# Altium PCB PCBv2.PcbDoc
Units mm, origin at the board's own origin, x right, y up, seen from the top; angles counter-clockwise.
Board outline 125 x 105.5 mm, 2 copper layers (Top Layer, Bottom Layer), stack 1.571 mm thick; 42 components, 22 nets, 90 pads, 0 vias.
Unrouted connection lines stored in the file: 3.
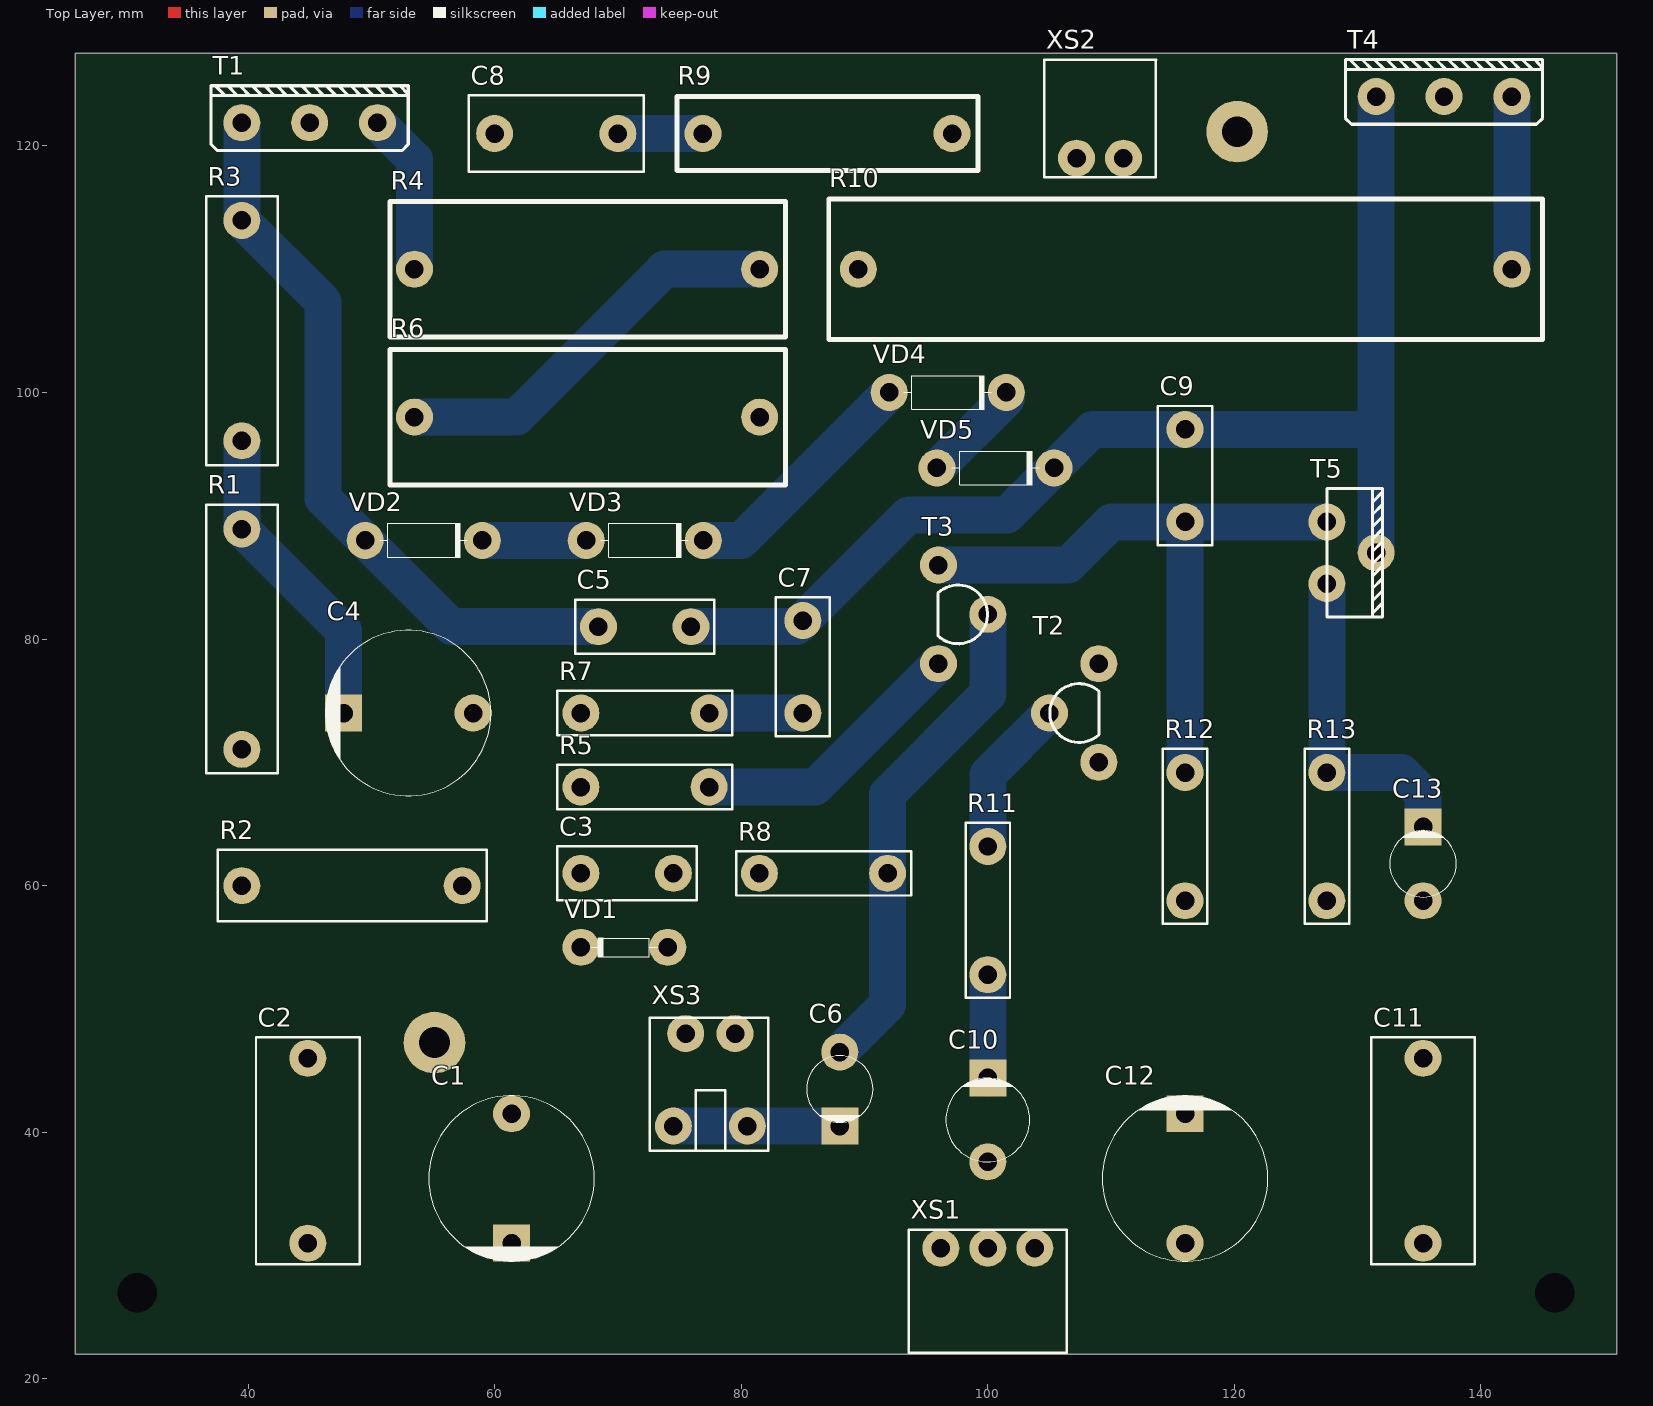
[diagram p0: Top Layer view]
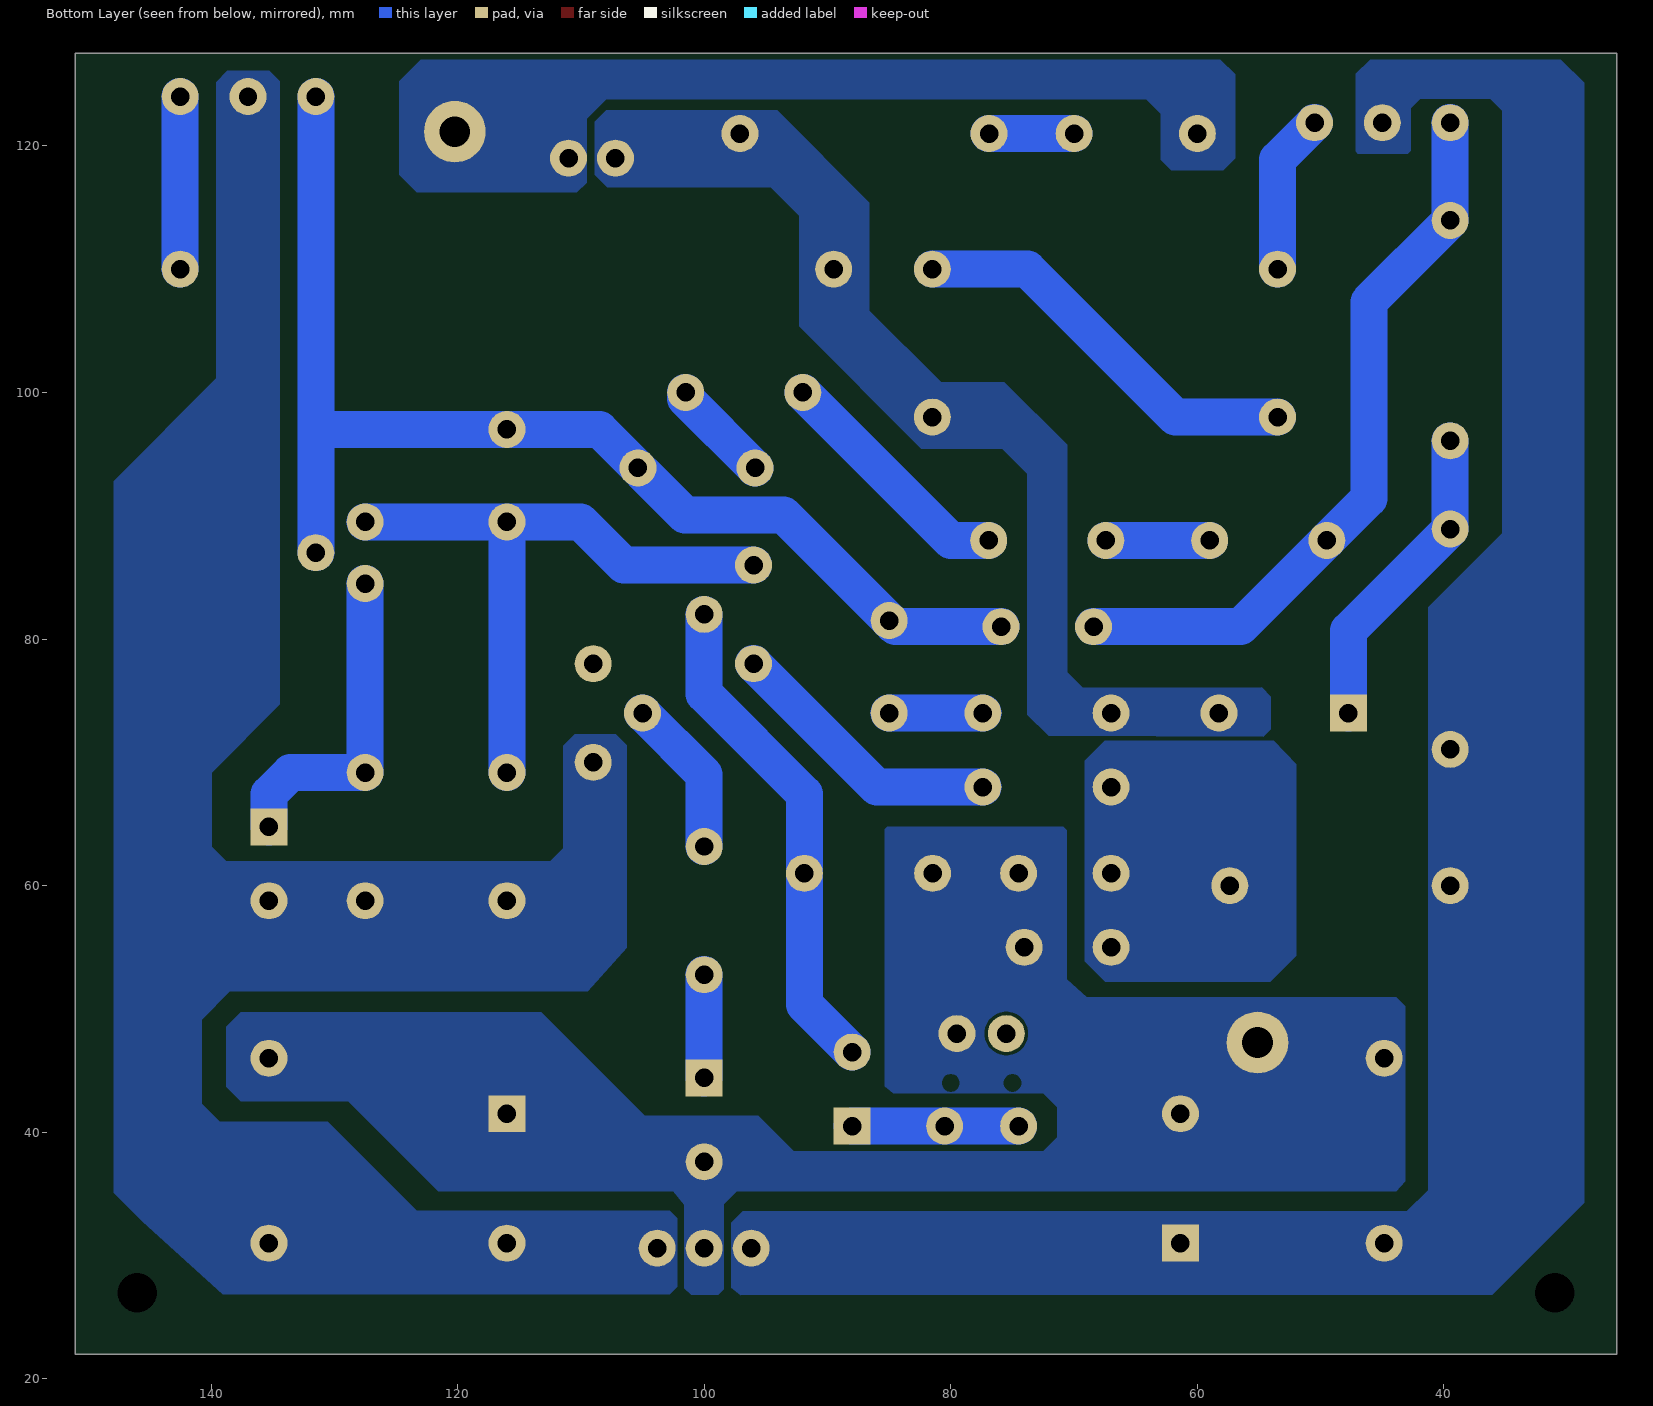
[diagram p1: Bottom Layer view, seen from below]
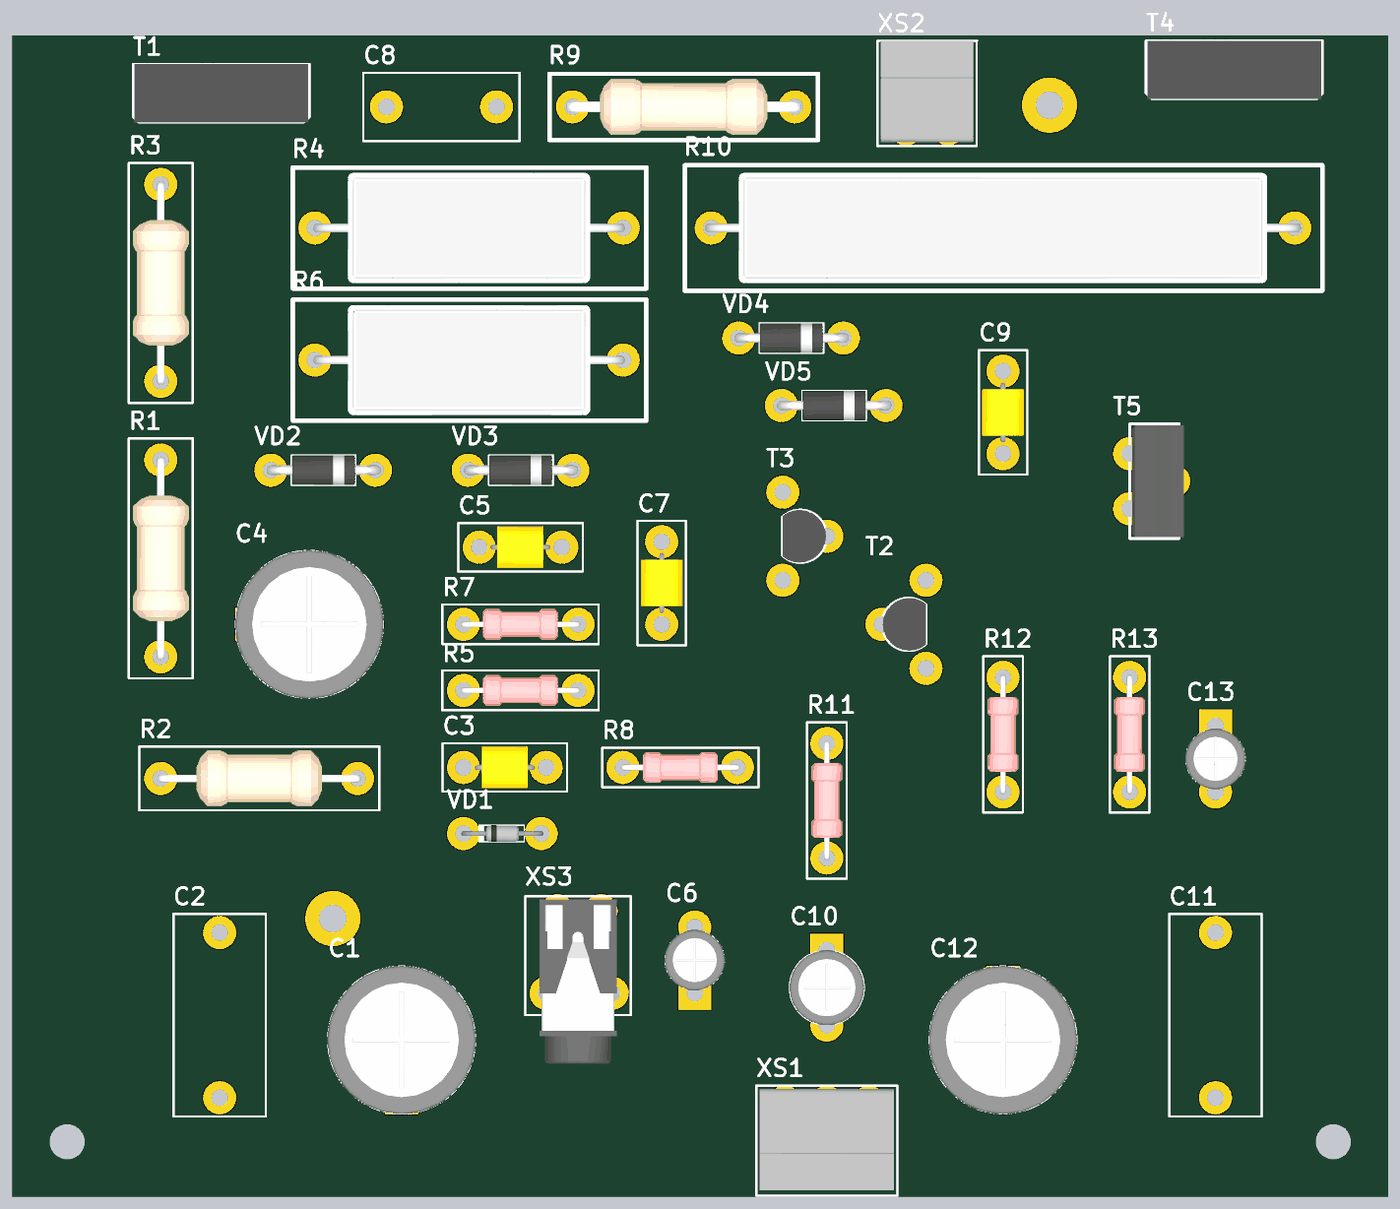
[diagram p2: 3D render of the assembled board from above, using the file's embedded part models]

## Layer stack, top to bottom
Top Solder: solder mask 0.0102, Solder Resist, Dk 3.5
Top Layer: signal copper 0.0356
Dielectric 1: dielectric 1.5, FR-4, Dk 4.8
Bottom Layer: signal copper 0.0356
Bottom Solder: solder mask 0.0102, Solder Resist, Dk 3.5

## Board outline
26,22 26,127.5 151,127.5 151,22

## Design rules (kind name [scope] priority, off if disabled: settings)
Clearance [All] p1: gap=0.254 ignorepadtopadclearanceinfootprint=FALSE except(0: Arc-Hole Track-Hole SMDPad-Hole THPad-Hole Via-Hole Fill-Hole Poly-Hole Region-Hole Text-Hole)
Height [All] p1: minheight=0 maxheight=50 prefheight=12.7
HoleSize [All] p1: absolutevalues=TRUE maxlimit=5 minlimit=0.025 maxpercent=80.000 minpercent=20.000
PolygonConnect PolygonConnect_2 [All vs IsNamedPolygon('GND_L02_P004') Or IsNamedPolygon('GND_L02_P007') Or IsNamedPolygon('NETC1_1_L02_P003') Or IsNamedPolygon('NETC3_1_L02_P005') Or IsNamedPolygon('NETC4_2_L02_P008') Or IsNamedPolygon('NETC11_2_L02_P006')] p1: connectstyle=Direct reliefconductorwidth=0.254 reliefentries=4 polygonreliefangle="90 Angle" airgapwidth=0.254
PolygonConnect PolygonConnect_1 [All vs IsNamedPolygon('NETC1_1_L02_P003')] p2: connectstyle=Direct reliefconductorwidth=0.254 reliefentries=4 polygonreliefangle="90 Angle" airgapwidth=0.254
PolygonConnect [All] p3: connectstyle=Relief reliefconductorwidth=0.254 reliefentries=4 polygonreliefangle="90 Angle" airgapwidth=0.254
RoutingVias [All] p1: holewidth=0.711 width=1.27 viastyle="Through Hole" minholewidth=0.711 minwidth=1.27 maxholewidth=0.711 maxwidth=1.27
SolderMaskExpansion [All] p1: expansion=0.102 istentingtop=FALSE
Width [All] p1: maxlimit=5 minlimit=0.254 preferedwidth=0.254
28 further rules are at their usual default settings.

## Classes and differential pairs
component class SchemeGOST: C1 C2 C3 C4 C5 C6 C7 C8 C9 C10 C11 C12 C13 R1 R2 R3 R4 R5 R6 R7 R8 R9 R10 R11 R12 R13 T1 T2 T3 T4 T5 VD1 VD2 VD3 VD4 VD5 XS1 XS2 XS3

## Components (designator, comment, footprint, x,y, rotation, side; value= is the part's Value field where it differs from the comment)
C1 "220uF/100V" "Cap 220U/100V" 61.375,36.25 r90 top
C2 "1uF/63V" "Cap 1u/63V" 44.85,38.5 r270 top
C3 "220nF" "Cap 220nF" 68,61 r0 top
C4 "220uF/50V" "Cap 220U/100V" 53,74 r0 top
C5 "470nF" "Cap 470n" 74.925,81 r180 top
C6 "10uF/25V" "Cap 10u/25V" 88,43.5 r90 top
C7 "220pF" "Cap 220p" 85,75 r90 top
C8 "100nF/100V" "Cap 100n/100V" 65,121 r0 top
C9 "100pF/100V" "Cap 100p" 116,90.5 r90 top
C10 "470uF/10V" "Cap 470u/10V" 100,41 r270 top
C11 "1uF/63V" "Cap 1u/63V" 135.3,38.5 r270 top
C12 "220uF/100V" "Cap 220U/100V" 116,36.25 r270 top
C13 "10uF/25V" "Cap 10u/25V" 135.3,61.775 r270 top
R1 "Resistor 1W" "Res 1W" 39.5,80 r270 top
R2 "Resistor 1W" "Res 1W" 48.45,60 r180 top
R3 "Resistor 1W" "Res 1W" 39.5,105 r90 top
R4 "Resistor 5W" "Res 5W" 67.5,110 r0 top
R5 "Resistor 0.25W" "Res 0.25W" 72.175,68 r180 top
R6 "Resistor 5W" "Res 5W" 67.5,98 r0 top
R7 "Resistor 0.25W" "Res 0.25W" 72.175,74 r180 top
R8 "Resistor 0.25W" "Res 0.25W" 86.7,61 r0 top
R9 "Resistor 2W" "Res 2W" 87,121 r0 top
R10 "Resistor 10W" "Res 10W" 116,110 r180 top
R11 "Resistor 0.25W" "Res 0.25W" 100,58 r90 top
R12 "Resistor 0.25W" "Res 0.25W" 116,64 r90 top
R13 "Resistor 0.25W" "Res 0.25W" 127.5,64 r90 top
T1 "TIP142" TO-247 45,121.875 r0 top
T2 "BC556B" TO-92-A 107,74 r270 top
T3 "BC556B" TO-92-A 98,82 r90 top
T4 "TIP147" TO-247 137,124 r0 top
T5 "BD241C" TO-220 129.5,87 r270 top
VD1 "ZPD12" DO-35 70.525,55 r180 top
VD2 "Diode 1N4001" DO-41 49.5,88 r0 top
VD3 "Diode 1N4001" DO-41 67.425,88 r0 top
VD4 "Diode 1N4001" DO-41 92,100 r0 top
VD5 "Diode 1N4001" DO-41 95.875,93.875 r0 top
XS1 "Connector 15EDGRC-3.81-03P" 15EDGRC-3.81-03P 100,30.6 r0 top
XS2 "Connector 15EDGRC-3.81-02P" 15EDGRC-3.81-02P 109.1,119 r180 top
XS3 "Connector ST-025" ST-025 74.1,39.9 r0 top
ZBOAS148591470 "Слой 2" "BOASVIEWlayer:Bottom Layer:1:1:32:1" 37.725,2323.35 r0 top (schematic designator fewf)
ZBOAS149689960 "Comment" "BOASVIEWside:Вид платы сверху:1:0:0:0" 38,2285 r0 top
ZBOAS634799751 "Comment" "BOASVIEWdrill:Таблица отверстий:0:0:0:0" 175.45,2494.4 r0 top

## Footprints (in the part's own frame and the unit in brackets; to place one, negate y for a bottom-side part, rotate by r counter-clockwise, add the part's x,y. Pads: shape width x height; smd on the part's side, far side on the other; paste and mask are expansions set on the pad)
15EDGRC-3.81-02P [mm] "PCB Header, 8A, 160 V, Pitch: 3.81mm, 2 Positions, MCV Serie"
  round 3 hole 1.5 unplated: 1(-1.905,0) 2(1.905,0)
  silkscreen extent -4.56,-8 4.51,1.55, body extent -4.21,-8 4.21,1.2, height 7.29
15EDGRC-3.81-03P [mm] "PCB Header, 8A, 160 V, Pitch: 3.81mm, 3 Positions, MCV Serie"
  round 3 hole 1.5 unplated: 1(-3.81,0) 2(0,0) 3(3.81,0)
  silkscreen extent -6.41,-8.5 6.41,1.5, body extent -6.11,-8 6.11,1.2, height 7.29
"BOASVIEWdrill:Таблица отверстий:0:0:0:0" [mm]
"BOASVIEWlayer:Bottom Layer:1:1:32:1" [mm]
"BOASVIEWside:Вид платы сверху:1:0:0:0" [mm]
"Cap 1u/63V" [mm]
  round 3 hole 1.5 unplated: 1(-7.5,0) 2(7.5,0)
  silkscreen extent -9.2,-4.2 9.2,4.2, body extent -9,-4 9,4, height 15
"Cap 10u/25V" [mm]
  rect 3x3 hole 1.5 unplated: 1(-3,0)
  round 3 hole 1.5 unplated: 2(3,0)
  silkscreen extent -2.7,-2.7 2.7,2.7, body extent -2.75,-2.75 2.75,2.75, height 15
"Cap 100n/100V" [mm]
  round 3 hole 1.5 unplated: 1(-5,0) 2(5,0)
  silkscreen extent -7.1,-3.1 7.1,3.1, body extent -6.75,-2.75 6.75,2.75, height 12
"Cap 100p" [mm]
  round 3 hole 1.5 unplated: 1(-1,0) 2(6.5,0)
  silkscreen extent -2.9,-2.2 8.4,2.2, body extent 0,-1.91 5.5,1.91, height 6.2
"Cap 220nF" [mm]
  round 3 hole 1.5 unplated: 1(-1,0) 2(6.5,0)
  silkscreen extent -2.9,-2.2 8.4,2.2, body extent 0,-1.91 5.5,1.91, height 5.2
"Cap 220p" [mm]
  round 3 hole 1.5 unplated: 1(-1,0) 2(6.5,0)
  silkscreen extent -2.9,-2.2 8.4,2.2, body extent 0,-1.91 5.5,1.91, height 6.2
"Cap 220U/100V" [mm]
  rect 3x3 hole 1.5 unplated: 1(-5.25,0)
  round 3 hole 1.5 unplated: 2(5.25,0)
  silkscreen extent -6.73,-6.71 6.71,6.71, body extent -6.75,-6.75 6.75,6.75, height 29
"Cap 470n" [mm]
  round 3 hole 1.5 unplated: 1(-1,0) 2(6.5,0)
  silkscreen extent -2.9,-2.2 8.4,2.2, body extent 0,-1.91 5.5,1.91, height 6.2
"Cap 470u/10V" [mm]
  rect 3x3 hole 1.5 unplated: 1(-3.4,0)
  round 3 hole 1.5 unplated: 2(3.4,0)
  silkscreen extent -3.4,-3.4 3.4,3.4, body extent -3.4,-3.4 3.4,3.4, height 15
DO-35 [mm]
  round 3 hole 1.5 unplated: 1(-3.525,0) 2(3.525,0)
  silkscreen extent -2.65,-0.8 2.68,0.75, body extent -3.72,-0.75 3.72,0.76, height 3.51
DO-41 [mm]
  round 3 hole 1.5 unplated: 1(0,0) 2(9.5,0)
  silkscreen extent 1.2,-1.38 8.3,1.38, body extent -0.39,-1.35 9.99,1.35, height 2.83
"Res 0.25W" [mm]
  round 3 hole 1.5 unplated: 1(-5.225,0) 2(5.175,0)
  silkscreen extent -7.1,-1.8 7.1,1.8, body extent -5.42,-1.4 5.42,1.4, height 3.89
"Res 1W" [mm]
  round 3 hole 1.5 unplated: 1(-8.925,0) 2(8.95,0)
  silkscreen extent -10.9,-2.9 10.9,2.9, body extent -9.24,-2.55 9.24,2.55, height 6.15
"Res 2W" [mm]
  round 3 hole 1.5 unplated: 1(-10.1,0) 2(10.1,0)
  silkscreen extent -12.2,-3 12.2,3, body extent -10.66,-2.55 10.66,2.55, height 6.25
"Res 5W" [mm]
  round 3 hole 1.5 unplated: 1(-14,0) 2(14,0)
  silkscreen extent -16,-5.5 16.1,5.5, body extent -14.15,-5 14.15,5, height 9
"Res 10W" [mm]
  round 3 hole 1.5 unplated: 1(-26.5,0) 2(26.5,0)
  silkscreen extent -29,-5.7 28.9,5.7, body extent -27.07,-5 27.07,5, height 9
ST-025 [mm]
  round 3 hole 1.5 unplated: 1(0.4,0.6) 1(6.4,0.6) 2(1.4,8.1) 3(5.4,8.1)
  silkscreen extent -1.5,-1.4 8.1,9.4, body extent -0.44,-5.8 7.04,9.1, height 6
TO-92-A [mm]
  round 3 hole 1.5 unplated: 1(4,2) 2(0,-2) 3(-4,2)
  silkscreen extent -2.38,-1.97 2.38,2.02, body extent -2.4,-1.92 2.4,2.01, height 10
TO-220 [mm]
  round 3 hole 1.5 unplated: 1(-2.5,-2) 2(0,2) 3(2.5,-2)
  silkscreen extent -5.2,-2 5.2,2.5, body extent -5.08,-1.78 5.08,2.92, height 26.87
TO-247 [mm]
  round 3 hole 1.5 unplated: 1(-5.5,0) 2(0,0) 3(5.5,0)
  silkscreen extent -8,-2.25 8,3, body extent -7.9,-2.3 7.9,3, height 26.1

## Part data
C1 C12: library part "Capacitor 220uF 100V", Published=18.05.2010, Publisher="Andrew Danich", Type=Конденсатор
C2 C11: library part "Capacitor 1uF 63V", Published=18.05.2010, Publisher="Andrew Danich", Type=Конденсатор
C3: library part "Capacitor 220nF", Published=18.05.2010, Publisher="Andrew Danich", Type=Конденсатор
C4: library part "Capacitor 220uF 50V", Published=18.05.2010, Publisher="Andrew Danich", Type=Конденсатор
C5: library part "Capacitor 470nF", Published=18.05.2010, Publisher="Andrew Danich", Type=Конденсатор
C6 C13: library part "Capacitor 10uF 25V", Published=18.05.2010, Publisher="Andrew Danich", Type=Конденсатор
C7: library part "Capacitor 220pF", Published=18.05.2010, Publisher="Andrew Danich", Type=Конденсатор
C8: library part "Capacitor 100nF 100V", Published=18.05.2010, Publisher="Andrew Danich", Type=Конденсатор
C9: library part "Capacitor 100pF 100V", Published=18.05.2010, Publisher="Andrew Danich", Type=Конденсатор
C10: library part "Capacitor 470uF 10V", Published=18.05.2010, Publisher="Andrew Danich", Type=Конденсатор
R1 R2 R3 R4 R5 R6 R7 R8 R9 R10 R11 R12 R13: Published=24.03.2010, Publisher="Andrew Danich", Type=Резистор
VD1: Published=20.05.2013, Publisher="Andrew Danich", Type=Стабилитрон
VD2 VD3 VD4 VD5: Published=18.05.2010, Publisher="Andrew Danich", Type=Диод

## Free pads (board coordinates)
  round 0 hole 3.2 unplated: 4(31,27) 4(146,27)
  round 5 hole 2.5 unplated: 5(55.125,47.275) 5(120.225,121.15)

## Nets (pads, with @x,y where several pads share a name; then routed paths per layer and width w, separated by ;. In a path a pad name is that pad's centre, name@x,y a point inside that pad or via, vN(x,y) a via of type N, cw(c..) or ccw(c..) an arc to the next point about the centre after c; other vN are vias at no path point)
GND: C1.2 C2.1 C3.2 C8.1 C10.2 C11.1 C12.1 pad.5 R8.1 VD1.1 XS1.2 XS2.1 XS3.3
NetC1_1: C1.1 C2.2 R1.2 R2.2 T1.2 XS1.1
NetC3_1: C3.1 R2.1 R5.2 VD1.2
NetC4_1: C4.1 R1.1 R3.1 | length 25.5
  Bottom Layer w3: R3.1 R1.1 47.75,80.675 C4.1
NetC4_2: C4.2 R6.2 R7.2 R9.2 R10.2 XS2.2
NetC5_1: C5.1 C7.2 C9.2 T4.1 T5.2 VD5.2 | length 99.2
  Bottom Layer w3: C5.1 84.5,81 C7.2 93.575,90.075 101.575,90.075 108.5,97 131.5,97 ; T5.2 131.5,97 ; T4.1 131.5,97
NetC5_2: C5.2 R3.2 T1.1 VD2.1 | length 59.8
  Bottom Layer w3: T1.1 R3.2 46.1,107.35 46.1,91.4 VD2.1 56.5,81 C5.2
NetC6_1: C6.1 XS3.1 | length 13.5
  Bottom Layer w3: XS3.1@74.5,40.5 80.5,40.5 C6.1
NetC6_2: C6.2 R8.2 T3.2 | length 40.5
  Bottom Layer w3: C6.2 91.875,50.375 R8.2 91.875,67.438 100,75.563 T3.2
NetC7_1: C7.1 R7.1 R11.2 T2.2 | length 20.5
  Bottom Layer w3: R7.1 C7.1 ; R11.2 100,69 T2.2
NetC8_2: C8.2 R9.1 | length 6.9
  Bottom Layer w3: C8.2 R9.1
NetC9_1: C9.1 R12.2 T3.1 T5.1 | length 53.3
  Bottom Layer w3: T3.1 106.525,86 110.025,89.5 C9.1 ; R12.2 C9.1 ; T5.1 C9.1
NetC10_1: C10.1 R11.1 | length 8.4
  Bottom Layer w3: C10.1 R11.1
NetC11_2: C11.2 C12.2 C13.2 R12.1 R13.1 T2.1 T4.2 XS1.3
NetC13_1: C13.1 R13.2 T5.3 | length 26.5
  Bottom Layer w3: T5.3 R13.2 133.543,69.175 135.3,67.418 C13.1
NetR4_1: R4.1 T1.3 | length 13.1
  Bottom Layer w3: T1.3 53.5,118.875 R4.1
NetR4_2: R4.2 R6.1 | length 33
  Bottom Layer w3: R6.1 61.775,98 73.775,110 R4.2
NetR5_1: R5.1 T2.3 T3.3 | length 22.7
  Bottom Layer w3: R5.1 86,68 T3.3
NetR10_1: R10.1 T4.3 | length 14
  Bottom Layer w3: R10.1 T4.3
NetVD2_2: VD2.2 VD3.1 | length 8.4
  Bottom Layer w3: VD2.2 VD3.1
NetVD3_2: VD3.2 VD4.1 | length 20
  Bottom Layer w3: VD3.2 80,88 VD4.1
NetVD4_2: VD4.2 VD5.1 | length 8.5
  Bottom Layer w3: VD5.1 101.5,99.5 VD4.2
pads on no net: XS3.2

## Polygon pours and split planes (outlines as drawn)
GND on Bottom Layer "GND_L02_P004" (solid, pour order 4): 70.6,64.5 70.875,64.775 85.15,64.775 85.35,64.575 85.35,43.742 84.684,43.15 72.5,43.15 71.375,42.025 71.375,39.575 72.5,38.45 92.725,38.45 95.625,41.35 104.81,41.35 108.575,45.115 113.21,49.75 137.575,49.75 138.75,48.575 138.75,43.675 137.575,42.5 128.875,42.5 121.575,35.2 102.512,35.2 101.6,34.132 101.6,27.365 101.035,26.825 98.86,26.825 98.4,27.264 98.4,34.165 97.365,35.2 43.868,35.2 43.125,36.044 43.125,50.2 43.875,50.95 68.993,50.95 70.6,52.4
NetC11_2 on Bottom Layer "NETC11_2_L02_P006" (solid, pour order 6): 123.3,33.625 102.8,33.625 102.2,33.025 102.2,27.45 102.8,26.85 139.05,26.85 145.55,32.75 147.9,35.1 147.9,48.925 147.9,70.375 147.9,92.807 139.573,101.134 139.573,125.177 138.675,126.075 135.275,126.075 134.432,125.232 134.432,74.693 139.95,69.175 139.95,63.15 138.775,61.975 112.5,61.975 111.425,63.05 111.425,71.35 110.5,72.275 107.175,72.275 106.275,71.375 106.275,54.976 109.455,51.425 138.464,51.425 140.75,49.139 140.75,42.297 139.303,40.85 130.525,40.85
NetC1_1 on Bottom Layer "NETC1_1_L02_P003" (solid, pour order 3): 41.275,35.314 43.014,33.575 96.875,33.575 97.8,32.65 97.8,27.381 97.045,26.8 36.083,26.806 28.625,34.264 28.625,125.1 30.525,127 46,127 47.15,125.85 47.15,119.55 46.975,119.375 42.925,119.375 42.69,119.61 42.7,123.048 41.923,123.825 36.25,123.825 35.257,122.832 35.257,88.587 41.275,82.57
NetC4_2 on Bottom Layer "NETC4_2_L02_P008" (solid, pour order 8): 73.8,93.425 75.825,95.45 82.4,95.45 92.3,105.35 92.3,114.325 94.6,116.625 107.85,116.625 108.888,117.663 108.888,121.938 107.95,122.875 98.875,122.875 94.075,122.875 86.6,115.4 86.6,106.625 80.828,100.853 75.671,100.846 70.575,95.75 70.575,94.1 70.575,77.325 69.3,76.05 54.799,76.074 54.05,75.325 54.05,72.7 54.674,72.076 72.071,72.146 73.8,73.875
GND on Bottom Layer "GND_L02_P007" (solid, pour order 7): 57.887,118.038 56.95,118.975 56.95,125.8 58.15,127 122.975,127 124.75,125.225 124.75,117.675 123.3,116.225 110.325,116.225 109.525,117.025 109.525,122.188 107.938,123.775 64.15,123.775 62.975,122.6 62.975,118.875 62.138,118.038
NetC3_1 on Bottom Layer "NETC3_1_L02_P005" (solid, pour order 5): 52,69.853 53.814,71.764 67.511,71.764 69.125,70.15 69.125,53.87 67.48,52.225 54.075,52.225 52,54.3

## Silkscreen, mask and mechanical layers (free items; w line width, h text height)
Mechanical 1:
  the board outline again, w0.1
Mechanical 7:
  text "BOASFORMAT|А3|1|0|883070867|165354330|1000000000|1:1|" at 0,2540 h0
  text "+0.1" at 258.831,2476 h3.5
  text "+0.1" at 315.581,2476 h3.5
  text "-0.1" at 258.826,2472.75 h3.5
  text "-0.1" at 315.576,2472.75 h3.5
  text "+0.1" at 258.831,2467.5 h3.5
  text "+0.1" at 315.581,2467.5 h3.5
  text "-0.1" at 258.826,2464 h3.5
  text "-0.1" at 315.576,2464 h3.5
  text "+0.1" at 258.606,2459.95 h3.5
  text "-0.1" at 258.601,2456.45 h3.5
  text "DimV|78740|-41387795|74891732|978405512|6033465|-40748032|1||||js12|False|False|False|False|2" at 162.725,2428.65 h0
  text "DimH|-49429133|78740|74970472|978326772|-403543|8759842|1||||js12|False|False|False|False|2" at 162.925,2428.45 h0
  text "* Размеры для справок / 1. Шаг координатной сетки 2.5мм / 2. Плату изготовить химическим негативным методом / 3. Класс точности 3 платы по ГОСТ Р 53429-2009 / 4. Параметры отверстий платы приведены в таблице / 5. Плата должна соответствовать ГОСТ 23752-79, / группа жесткости - 1 / 6. Финишное покрытие металлизированных поверхностей / меди по ГОСТ 9.301-86 толщиной не менее 50мкм с флюсом ЛТИ-120 ГОСТ 19250-73 и припоем ПОС-61 ГОСТ 21930-76 / 7. Промывка по ГОСТ Р 70798-2023 изопропиловым спиртом ГОСТ 9805-84 / 8. Контроль оптико-визуальным методом при 16x увеличении по ГОСТ 23752.1-92 / 9. Контроль функциональный методом ручной прозвонки по ГОСТ 23752.1-92 / 10. Остальные технические требования по ОСТ 4 ГО.070.015-75" at 214,2323.5 h7.5
  text "DimRoughness|0|0|-49862205|-918651575|1|||||0|0|False|2" at 101.325,2286.775 h0
  text "DimV|0|-590551|81102362|922440945|4724410|-1771654|2||||js12|False|False|False|False|2" at 157,2286.5 h0
  text "DimV|-2165352|-590550|76181102|919094488|2755906|196851|1||||js12|False|False|False|False|2" at 168,2286.5 h0
  text "DimV|0|0|74015750|918503938|-2|590550|1||||js12|False|False|False|False|2" at 162.5,2285 h0
  text "SET2|Superlayer=MechanicalLayer7|Wsuperlayer=MechanicalLayer8|Layergrid=MechanicalLayer9|Werase=MechanicalLayer11|Layermark=MechanicalLayer12|Layerstamp=MechanicalLayer13|Thinline=0,18|Basicline=0,6|Gridline=0,18|Boardline=0,6|Contourpolygonline=0,6|PcbGridStep=2,5|PcbGridNumbering=False|PcbGridCleareanceAtView=0|PcbGridNumberEach=l5|PcbGridLineEach=l2|PcbGridCountSecondaryStrip=1|PcbGridEnabledStrip=True|PcbGridHorizontal90=False|PcbGridWhiteAreaBeforeText=True|PcbSignalGridEnabled=True|PcbSignalShowBukva=True|RealSignalLayerNames=False|PcbGridEnabledBothSide=False|PcbPolarGridEnabled=False|PcbPolarGridAngleStep=10|PcbPolarGridRadialStep=10|PcbPolarGridCenterPcbGrid=False|SilkShowPad=True|SilkViewName=Слой маркировки|SilkShowHole=True|SilkShowAxis=True|SilkShowBukva=True|SilkShowGrid=False|SolderShowGrid=False|SolderViewName=Слой маски|SolderShowAxis=False|SolderShowBukva=False|MainViewShowGrid=True|MainViewMinDiameterHoles=2|MainViewUseShapesDrill=False|ShowBukvaOnSboky=True|ShowBukvaViews=True|Density=0|CustomHoleSizeFactor=1|TableName=Таблица сверловки|RazrezWidth=100|RealLayerNames=False|RazrezShowBukva=False|RazrezBukva=В-В|Sher=Ra 12,5|Asstoplayer=MechanicalLayer1|Asstoplayer2=None|Assbottomlayer=MechanicalLayer2|Assbottomlayer2=None|AssMinDiameterHoles=2|AssDim=False|AssMech=False|AssSilk=False|AssComponentSilk=False|AssFreeSilk=False|AssSmdPads=False|AssGridEnable=False|AssShowBukva=True|Mirror=Horisontal|PcbGridFontSize=5|PcbGridCenterZero=False|TTStampDistance=12|MainFontSize=5|PolyShtrihEnable=True|RegionShtrihEnable=False|PolyStep=2|PcbDrillDrawingGridEnabled=False|PcbDrillDrawingViewName=Слой сверловки|PcbDrillDrawingShowBukva=False|PcbDrillDrawingShowAxis=False|PcbSignalLayersUseDrill=True|PcbSignalLayersUseWhiteHoles=True|PcbSignalLayersUseShapesDrill=False|PcbSignalLayersShowAxis=True" at 0,0.025 h0
  text "STAMP|Разработал|Дорунц Ш.А." at 0,0 h0
  text "STAMP|Проверил|Семенцов С.Г." at 0,0 h0
  text "STAMP|Техконтроль|" at 0,0 h0
  text "STAMP|Начальник отдела|" at 0,0 h0
  text "STAMP|Нормоконтроль|" at 0,0 h0
  text "STAMP|Утвердил|" at 0,0 h0
  text "STAMP|Var|" at 0,0 h0
  text "STAMP|Tech|Т.контр." at 0,0 h0
  text "STAMP|Normo|Н.контр." at 0,0 h0
  text "STAMP|Check|Пров." at 0,0 h0
  text "STAMP|Design|Разраб." at 0,0 h0
  text "STAMP|Utv|Утв." at 0,0 h0
  text "STAMP|Обозначение|ИУ4.11.03.03.23.05.52.09.002 ПП" at 0,0 h0
  text "STAMP|Первичная применяемость|ИУ4.11.03.03.23.05.52.09.001" at 0,0 h0
  text "STAMP|Компания1|МГТУ им. Н.Э. Баумана" at 0,0 h0
  text "STAMP|Наименование1|Усилитель низких частот" at 0,0 h0
  text "STAMP|ТипДокумента|Плата печатная" at 0,0 h0
  text "STAMP|Материал1|FR4 ГОСТ 26246.5-89" at 0,0 h0
  text "STAMP|Материал2|" at 0,0 h0
  text "STAMP|Масса|" at 0,0 h0
  text "STAMP|Lit|" at 0,0 h0
  text "STAMP|Наименование2|" at 0,0 h0
  text "STAMP|Компания2|Кафедра ИУ4" at 0,0 h0
  text "BOASVIADRILLTABLE:" at 0,0 h0
  text "2BOASDRILLTABLE:circle0101,590551,Нет,86,True,|circle1010,984252,Нет,2,True,|circle0010,1259843,Нет,2,True," at 0,0 h0
Mechanical 8:
  region: 168.908,2284.908 168.261,2283.215 167.77,2279.501 168.904,2279.5 168.905,2280.432 168.342,2280 168.997,2284.907
  region: 169.092,2284.908 169.739,2283.215 170.23,2279.501 169.096,2279.5 169.095,2280.432 169.658,2280 169.003,2284.907
  region: 169.092,2286.592 169.739,2288.285 170.23,2291.999 169.096,2292 169.095,2291.068 169.658,2291.5 169.003,2286.593
  region: 168.908,2286.592 168.261,2288.285 167.77,2291.999 168.904,2292 168.905,2291.068 168.342,2291.5 168.997,2286.593
  region: 184.908,2428.908 184.261,2427.215 183.77,2423.501 184.904,2423.5 184.905,2424.432 184.342,2424 184.997,2428.907
  region: 185.092,2428.908 185.739,2427.215 186.23,2423.501 185.096,2423.5 185.095,2424.432 185.658,2424 185.003,2428.907
  region: 185.092,2323.592 185.739,2325.285 186.23,2328.999 185.096,2329 185.095,2328.068 185.658,2328.5 185.003,2323.593
  region: 184.908,2323.592 184.261,2325.285 183.77,2328.999 184.904,2329 184.905,2328.068 184.342,2328.5 184.997,2323.593
  region: 162.408,2446.592 160.715,2447.239 157.001,2447.73 157,2446.596 157.932,2446.595 157.5,2447.158 162.407,2446.503
  region: 162.408,2446.408 160.715,2445.761 157.001,2445.27 157,2446.404 157.932,2446.405 157.5,2445.842 162.407,2446.497
  region: 37.592,2446.408 39.285,2445.761 42.999,2445.27 43,2446.404 42.068,2446.405 42.5,2445.842 37.593,2446.497
  region: 37.592,2446.592 39.285,2447.239 42.999,2447.73 43,2446.596 42.068,2446.595 42.5,2447.158 37.593,2446.503
Mechanical 9:
  region: 169,2285 169.658,2280 169,2280.5 168.342,2280
  region: 169,2286.5 168.342,2291.5 169,2291 169.658,2291.5
  region: 185,2429 185.658,2424 185,2424.5 184.342,2424
  region: 185,2323.5 184.342,2328.5 185,2328 185.658,2328.5
  region: 162.5,2446.5 157.5,2445.842 158,2446.5 157.5,2447.158
  region: 37.5,2446.5 42.5,2447.158 42,2446.5 42.5,2445.842
  lines w0.18: 37.5,2426 37.5,2447.5 ; 37.5,2446.5 162.5,2446.5 ; 157,2285 170,2285 ; 157,2286.5 170,2286.5 ; 159,2323.5 186,2323.5 ; 159,2429 186,2429 ; 162.5,2426.5 162.5,2447.5 ; 169,2265.345 169,2294.5 ; 185,2323.5 185,2429
  text "125*" at 96.474,2449.03 h7.68
  text "105*" at 182.47,2370.996 h7.68 r90
  text "2*" at 166.47,2269.465 h7.68 r90
Mechanical 13:
  lines w0.18: 230,2253 295,2253 ; 230,2258 295,2258 ; 230,2263 295,2263 ; 230,2268 295,2268 ; 230,2273 295,2273 ; 230,2288 295,2288 ; 230,2293 295,2293 ; 230,2298 295,2298 ; 369.96,2268 369.96,2283 ; 374.98,2268 374.98,2283 ; 0,2243 420,2243 420,2540 0,2540 0,2243
  lines w0.6: 8,2273 20,2273 ; 8,2308 20,2308 ; 8,2333 20,2333 ; 8,2358 20,2358 ; 8,2475 20,2475 ; 13,2248 13,2393 ; 13,2415 13,2535 ; 20,2393 8,2393 8,2248 20,2248 ; 20,2415 8,2415 8,2535 20,2535 ; 20,2521 90,2521 90,2535 ; 230,2248 230,2303 415,2303 ; 230,2278 295,2278 ; 230,2283 295,2283 ; 237,2278 237,2303 ; 247,2248 247,2303 ; 270,2248 270,2303 ; 285,2248 285,2303 ; 295,2248 295,2303 415,2303 ; 295,2263 365,2263 415,2263 ; 295,2288 415,2288 ; 352,2524 357,2515 364.6,2529 ; 364.7,2529 407,2529 ; 365,2248 365,2288 ; 365,2268 415,2268 ; 365,2283 380,2283 415,2283 ; 380,2268 380,2288 ; 385.57,2263 385.57,2268 ; 397,2268 397,2288 ; 415,2311 415,2303 ; 20,2248 415,2248 415,2535 20,2535 ; 20,2248 20,2535
  text "ИУ4.11.03.03.23.05.52.09.002 ПП" at 89.496,2529.872 h5.94 r180
  text "Ra 12,5" at 364.7,2516.7 h10.75
  text "Перв. примен." at 12.194,2491.232 h5.38 r90
  text "ИУ4.11.03.03.23.05.52.09.001" at 18.194,2477.797 h5.38 r90
  text "Справ. №" at 12.194,2435.033 h5.38 r90
  text "Подп. и дата" at 12.194,2361.891 h5.38 r90
  text "Инв. № дубл." at 12.194,2332.399 h5.38 r90
  text "Взам. инв. №" at 12.194,2307.346 h5.38 r90
  text "ИУ4.11.03.03.23.05.52.09.002 ПП" at 310.381,2293.079 h7.68
  text "Лит." at 368.295,2283.806 h5.38
  text "Масса" at 382.859,2283.806 h5.38
  text "Масштаб" at 397.002,2283.806 h5.38
  text "Изм." at 229.542,2278.806 h5.38
  text "Лист" at 237.024,2278.806 h5.38
  text "№ докум." at 249.51,2278.806 h5.38
  text "Подп." at 272.457,2278.806 h5.38
  text "Дата" at 284.556,2278.806 h5.38
  text "Подп. и дата" at 12.194,2277.391 h5.38 r90
  text "Усилитель низких частот" at 295.5,2276.852 h6.82
  text "Разраб." at 230.533,2273.771 h5.38
  text "Дорунц Ш.А." at 247.68,2273.771 h4.74
  text "1:1" at 403.092,2273.079 h7.68
  text "Пров." at 230.533,2268.771 h5.38
  text "Семенцов С.Г." at 247.68,2268.771 h4.31
  text "Плата печатная" at 312.866,2265.306 h5.38
  text "Т.контр." at 230.533,2263.771 h5.38
  text "Лист" at 366.442,2263.771 h5.38
  text "Листов" at 387.485,2263.771 h5.38
  text "1" at 407.306,2263.771 h5.38
  text "МГТУ им. Н.Э. Баумана" at 367.625,2258.675 h5.08
  text "Стеклотекстолит" at 311,2258.35 h5.38
  text "Кафедра ИУ4" at 377.375,2254 h5.08
  text "Н.контр." at 230.533,2253.771 h5.23
  text "FR4 ГОСТ 26246.5-89" at 307.075,2251.85 h5.38
  text "Группа ИУ4-52Б" at 373.3,2249.825 h5.08
  text "Утв." at 230.533,2248.771 h5.38
  text "Инв. № подл." at 12.194,2247.399 h5.38 r90
  text "Копировал" at 305.533,2243.771 h5.38
  text "Формат А3" at 383.401,2243.771 h5.38

## Text inside footprints (layer, text, board x,y; h text height)
ZBOAS148591470: Mechanical 7 "50" at 158.732,2313.217 h8.75; Mechanical 7 "45" at 145.997,2313.217 h8.75; Mechanical 7 "40" at 133.63,2313.217 h8.75; Mechanical 7 "35" at 121.086,2313.217 h8.75; Mechanical 7 "30" at 108.72,2313.217 h8.75; Mechanical 7 "25" at 96.078,2313.217 h8.75; Mechanical 7 "20" at 83.711,2313.217 h8.75; Mechanical 7 "15" at 72.196,2313.217 h8.75; Mechanical 7 "10" at 59.829,2313.217 h8.75; Mechanical 7 "5" at 48.01,2313.217 h8.75; Mechanical 7 "0" at 35.777,2313.217 h8.75; Mechanical 7 "40" at 25.536,2420.592 h8.75; Mechanical 7 "35" at 25.447,2408.092 h8.75; Mechanical 7 "30" at 25.714,2395.592 h8.75; Mechanical 7 "25" at 25.431,2383.092 h8.75; Mechanical 7 "20" at 25.698,2370.592 h8.75; Mechanical 7 "15" at 27.666,2358.092 h8.75; Mechanical 7 "10" at 27.933,2345.592 h8.75; Mechanical 7 "5" at 29.294,2333.092 h8.75; Mechanical 7 "0" at 29.829,2320.592 h8.75
ZBOAS634799751: Mechanical 12 "-" at 308.832,2456.776 h7.68; Mechanical 12 "Нет" at 360.607,2456.776 h7.68; Mechanical 12 "3,2" at 249.618,2456.776 h7.68; Mechanical 12 "2" at 396.979,2456.776 h7.68; Mechanical 12 "5,0" at 305.818,2464.878 h7.68; Mechanical 12 "Нет" at 360.607,2464.878 h7.68; Mechanical 12 "2,5" at 249.447,2464.878 h7.68; Mechanical 12 "2" at 396.979,2464.878 h7.68; Mechanical 12 "3,0" at 305.807,2472.979 h7.68; Mechanical 12 "Нет" at 360.607,2472.979 h7.68; Mechanical 12 "1,5" at 250.428,2472.979 h7.68; Mechanical 12 "86" at 395.323,2472.979 h7.68; Mechanical 12 "отв." at 393.129,2480.729 h7.68; Mechanical 12 "Кол." at 393.25,2488.229 h7.68; Mechanical 12 "металлизации" at 345.275,2480.729 h7.68; Mechanical 12 "Наличие" at 354.372,2488.229 h7.68; Mechanical 12 "площадки, мм" at 289.871,2480.729 h7.68; Mechanical 12 "Диаметр контактной" at 277.807,2488.229 h7.68; Mechanical 12 "мм" at 249.938,2480.729 h7.68; Mechanical 12 "Диаметр отв.," at 232.804,2488.229 h7.68; Mechanical 12 "обозначение отв." at 177.95,2480.729 h7.68; Mechanical 12 "Условное" at 190.274,2488.229 h7.68; Mechanical 12 "Таблица сверловки" at 175.45,2495.9 h7.68